# Allegro board Libra.brd
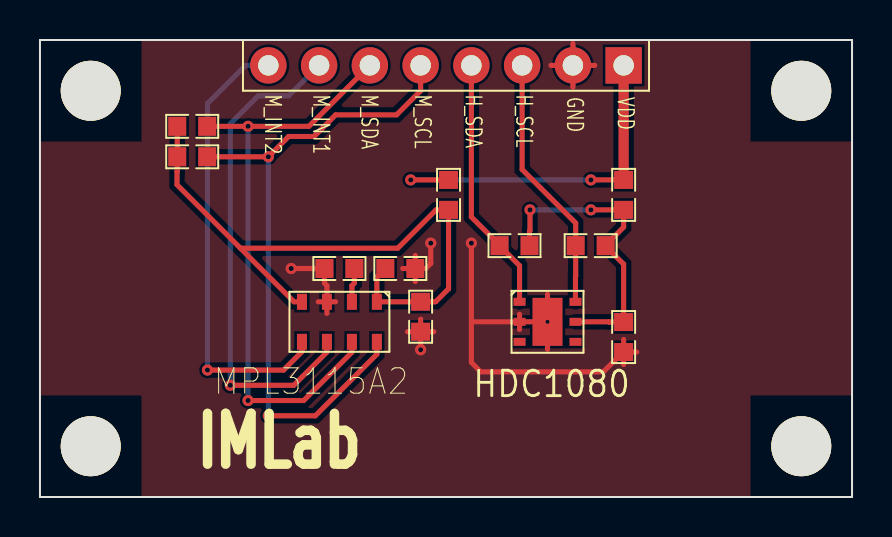
[diagram p0: board, top side]
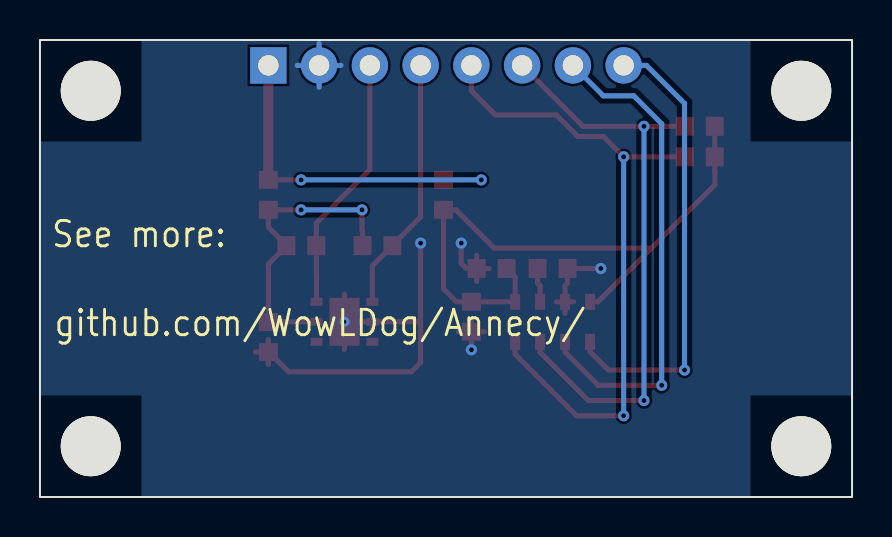
[diagram p1: board, bottom side, seen from below]

Outline 40.64 x 22.86 mm; copper layers: TOP, BOTTOM. Coordinates in mm from the lower left corner of the outline.
Outline path: rectangle 0,0 40.64,22.86

## Placement (name value [footprint] x y rotation side)
C1  10uF  [C0603]  18.03 11.43 180 top
C2  0.1uF  [C0603]  29.21 8 90 top
C3  100nF  [C0603]  19.05 9.02 90 top
C4  100nF  [C0603]  14.99 11.43 0 top
J1  Header8x1  [HEADER8X1]  20.32 21.59 270 top
NOREF  -  [unnamed]  2.54 2.54 0 top
NOREF#2  -  [unnamed]  38.1 2.54 0 top
NOREF#3  -  [unnamed]  38.1 20.32 0 top
NOREF#4  -  [unnamed]  2.54 20.32 0 top
R1  0R  [R0603]  29.21 15.11 90 top
R2  0R  [R0603]  20.45 15.11 90 top
R3  4.99k  [R0603]  7.62 17.02 180 top
R4  4.99k  [R0603]  23.75 12.57 0 top
R5  4.99k  [R0603]  27.56 12.57 0 top
R6  4.99k  [R0603]  7.62 18.54 180 top
U1  HDC1080  [WSON310X310]  25.4 8.76 0 top
U2  MPL3115A1  [LGA30X50]  14.99 8.76 270 top

## Library data of the parts
C1-C4 = Capacitor
J1 = Header8x1
R1-R6 = Resistor
U1 = HDC1080
U2 = MPL3115A2

## Footprints (pads in the part's own frame, mm; a bottom-side part is the same pattern mirrored in y, then rotated)
C0603
  rect 0.899x0.95 smd: 1(-0.749,0) 2(0.749,0)
HEADER8X1
  rect 1.821x1.821 hole 1.021: 1(0,8.89)
  round 1.821 hole 1.021: 2(0,6.35) 3(0,3.81) 4(0,1.27) 5(0,-1.27) 6(0,-3.81) 7(0,-6.35) 8(0,-8.89)
LGA30X50
  rect 0.8x0.5 smd: 1(-1.001,1.875) 2(-1.001,0.625) 3(-1.001,-0.625) 4(-1.001,-1.875) 5(1.001,-1.875) 6(1.001,-0.625) 7(1.001,0.625) 8(1.001,1.875)
R0603
  rect 0.899x0.95 smd: 1(-0.749,0) 2(0.749,0)
unnamed
  round 3 hole 3 unplated: (0,0)
WSON310X310
  rect 0.599x0.399 smd: 1(-1.4,1.001) 2(-1.4,0) 3(-1.4,-1.001) 4(1.4,-1.001) 5(1.4,0) 6(1.4,1.001)
  rect 1.501x2.4 smd: 7(0,0)

## Nets
GND: C1.1 C2.1 C3.1 C4.1 J1.2 U1.2(GND) U1.7(PAD) U2.3(GND)
VDD: J1.1 R1.2 R2.2
HDC_SCL: J1.3 R5.1 U1.6(SCL)
HDC_SDA: J1.4 R4.1 U1.1(SDA)
HDC_VDD: C2.2 R1.1 R4.2 R5.2 U1.5(VDD)
MPL_INT1: J1.7 U2.6(INT1)
MPL_INT2: J1.8 U2.5(INT2)
MPL_SCL: J1.5 R3.1 U2.8(SCL)
MPL_SDA: J1.6 R6.1 U2.7(SDL)
MPL_VDD: C1.2 C3.2 R2.1 R3.2 R6.2 U2.1(VDD) U2.4(VDDIO)
N01080: C4.2 U2.2(CAP)

Pads without a net: U1 3 4

## Via types
v1: diameter 0.559, hole 0.254, TOP to BOTTOM, 14 vias
v2: diameter 0.508, hole 0.203, TOP to BOTTOM, 1 via

## Routing (per net, layer and track width the routed paths; a pad name or vN(x,y) marks a point on that pad's centre or on a via; arc(x,y) is an arc through that point)
GND: length 43.8
  TOP w0.254: 18.78,10.77 C1.1 ; C1.1 19.3,11.43 19.56,11.68 v1(19.56,12.7) ; C1.1 18.15,11.43 ; C1.1 18.78,12.09 ; 21.59,8.76 v1(21.59,12.7) ; 21.59,8.76 U1.2 ; 21.59,8.76 21.59,6.73 22.06,6.26 28.19,6.26 29.18,7.25 C2.1 ; 25.58,21.59 J1.2 ; J1.2 26.67,20.5 ; J1.2 26.67,22.68 ; J1.2 27.76,21.59 ; 29.21,6.62 C2.1 ; C2.1 29.87,7.25 ; C2.1 29.21,7.88 ; U2.3 14.79,9.76 ; U2.3 13.93,9.76 ; U2.3 14.36,9.18 ; U2.3 14.36,10.58 14.24,10.7 C4.1 ; C4.1 14.24,11.54 ; C4.1 v1(12.57,11.43) ; C3.1 19.05,8.9 ; C3.1 v1(19.05,7.37) ; C3.1 19.71,8.27 ; C3.1 18.39,8.27 ; U1.2 24,9.14 ; U1.2 24,8.38 ; U1.2 v2(25.4,8.76) ; 25.4,7.38 v2(25.4,8.76) ; v2(25.4,8.76) 25.4,10.14
  BOTTOM w0.254: J1.2 27.76,21.59 ; J1.2 26.67,20.5 ; J1.2 25.58,21.59 ; J1.2 26.67,22.68
VDD: length 18.3
  TOP w0.254: R2.2 v1(18.55,15.86) ; R1.2 v1(27.57,15.86)
  TOP w0.508: R1.2 J1.1
  BOTTOM w0.254: v1(18.55,15.86) v1(27.57,15.86)
HDC_SCL: length 12.9
  TOP w0.254: U1.6 26.8,11.05 26.81,11.06 R5.1 26.81,13.7 24.13,16.38 J1.3
HDC_SDA: length 12.8
  TOP w0.254: U1.1 24,11.57 R4.1 23,12.6 21.59,14.01 J1.4
HDC_VDD: length 15.3
  TOP w0.254: U1.5 28.47,8.76 28.48,8.75 C2.2 29.21,11.65 28.31,12.55 R5.2 28.31,12.6 29.21,13.5 R1.1 v1(27.57,14.36) ; v1(24.52,14.36) 24.52,13.33 24.5,13.3 R4.2
  BOTTOM w0.254: v1(27.57,14.36) v1(24.52,14.36)
MPL_INT1: length 24.8
  TOP w0.254: U2.6 14.36,7.25 12.7,5.59 v1(9.53,5.59)
  BOTTOM w0.254: v1(9.53,5.59) 9.53,18.67 10.92,20.07 12.45,20.07 J1.7
MPL_INT2: length 22.8
  TOP w0.254: v1(8.38,6.35) 12.19,6.35 13.11,7.27 U2.5
  BOTTOM w0.254: v1(8.38,6.35) 8.38,19.68 10.29,21.59 J1.8
MPL_SCL: length 33.6
  TOP w0.254: v1(11.43,4.06) 13.78,4.06 16.86,7.14 U2.8 ; J1.5 19.05,20.32 17.84,19.11 14.8,19.11 13.72,18.03 12.45,18.03 v1(11.43,17.02) R3.1
  BOTTOM w0.254: v1(11.43,4.06) v1(11.43,17.02)
MPL_SDA: length 29.8
  TOP w0.254: v1(10.41,4.83) 13.2,4.83 15.61,7.24 U2.7 ; R6.1 v1(10.41,18.54) 13.46,18.54 J1.6
  BOTTOM w0.254: v1(10.41,4.83) v1(10.41,18.54)
MPL_VDD: length 32.5
  TOP w0.254: 10.03,12.45 17.91,12.45 19.82,14.36 R2.1 20.45,10.41 19.81,9.78 19.79,9.78 19.78,9.77 C3.2 19.05,9.76 U2.1 16.86,11.01 C1.2 ; 10.03,12.45 12.72,9.76 U2.4 ; 10.03,12.45 6.86,15.62 6.86,16.28 6.87,16.29 R3.2 R6.2
N01080: length 1.7
  TOP w0.254: U2.2 15.61,10.58 15.74,10.7 C4.2

## Copper pours and planes (outline as drawn; the poured copper is in the pictures)
GND on TOP, BOTTOM: 5.08,0 5.08,5.08 0,5.08 0,17.78 5.08,17.78 5.08,22.86 35.56,22.86 35.56,17.78 40.64,17.78 40.64,5.08 35.56,5.08 35.56,0

## Text on the board
Ref Des/Silkscreen Bottom: github.com/WowLDog/Annecy/ | See more:
Board Geometry/Soldermask Top: Instrument and | Measurement Laboratory
Ref Des/Silkscreen Top: M_INT2 | M_INT1 | M_SDA | M_SCL | H_SDA | H_SCL | GND | VDD | HDC1080 | MPL3115A2 | IMLab
NCLEGEND-1-2: FIGURE | SIZE | 8.0 | 10.0 | 40.2 | 118.1 | DRILL CHART: TOP to BOTTOM | ALL UNITS ARE IN MILS | PLATED | NON-PLATED | QTY | 1 | 14 | 8 | 4
